# Allegro board Led_touch_3dprinter_24V.brd
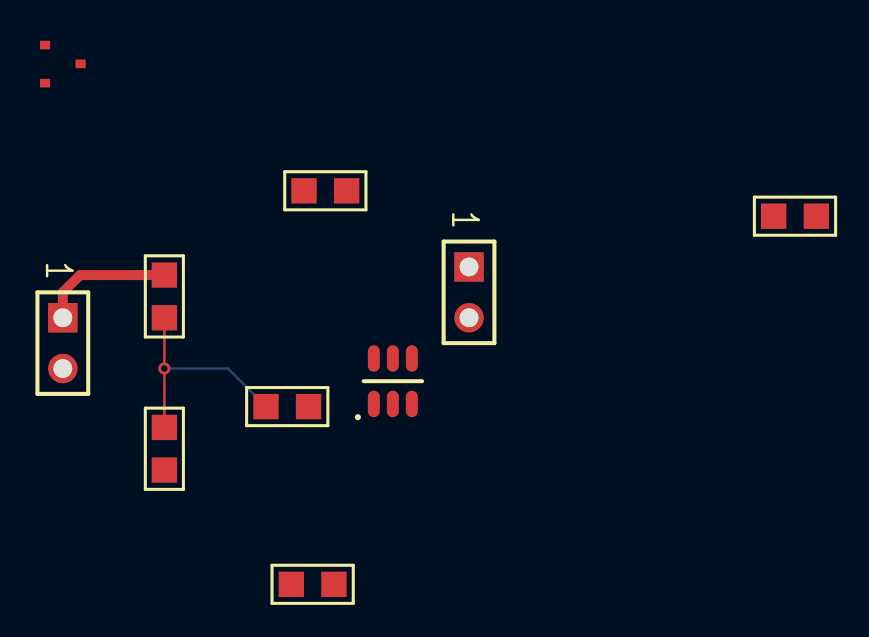
[diagram p0: board, top side]
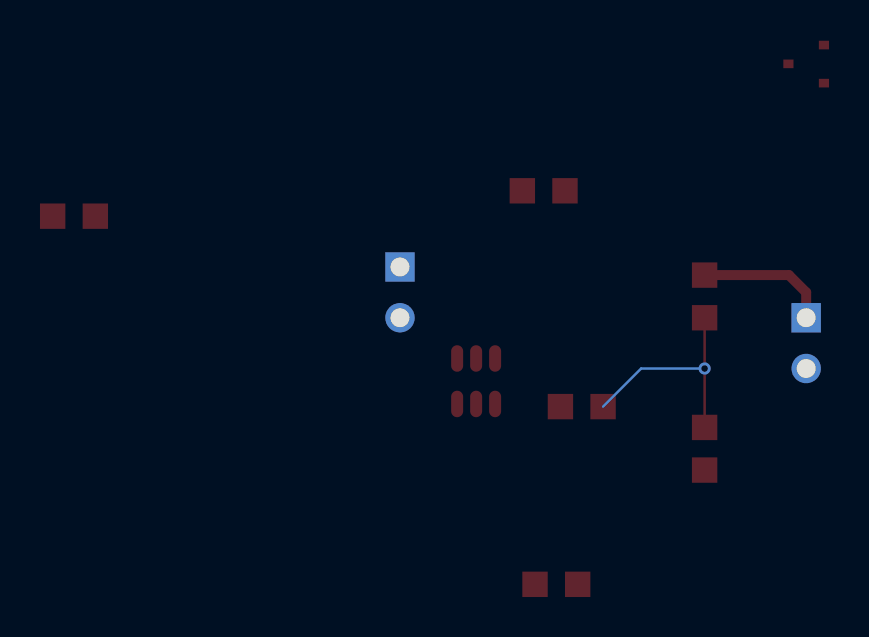
[diagram p1: board, bottom side, seen from below]

No outline. copper layers: TOP, BOTTOM. Coordinates in mm from the lowest, leftmost part position.

## Design rules (mm)
constraint set DEFAULT: min track width 0.127

## Placement (name value [footprint] x y rotation side)
C1  10pf  [SMC0805]  12.06 19.69 0 top
C2  100nf  [SMC0805]  10.16 8.89 0 top
C3  1uf  [SMC0805]  35.56 18.42 0 top
J1  HEADER 2  [BLKCON100VHTM1SQW1002]  20.32 15.88 270 top
J2  HEADER 2  [BLKCON100VHTM1SQW1002]  0 13.34 270 top
M1  AO3402  [SOT23]  0 26.04 0 top
R1  100k  [SMC0805]  5.08 13.34 90 top
R2  24k  [SMC0805]  5.08 5.72 90 top
R3  10  [SMC0805]  11.43 0 0 top
U1  ttp223  [SOT23_6]  16.51 10.16 90 top

## Library data of the parts
C1-C3 = C
J1 J2 = HEADER 2
M1 = IRFZ34_1
R1-R3 = R
U1 = ttp223

## Footprints (pads in the part's own frame, mm; a bottom-side part is the same pattern mirrored in y, then rotated)
BLKCON100VHTM1SQW1002
  rect 1.473x1.473 hole 0.94: 1(0,0)
  round 1.473 hole 0.94: 2(2.54,0)
SMC0805
  rect 1.27x1.27 smd: 1(0,0) 2(2.134,0)
SOT23
  rect 0.508x0.432 smd: 1(-0.889,0.94) 2(-0.889,-0.965) 3(0.889,0)
SOT23_6
  oval 1.325x0.6 smd: 1(-1.137,0.95) 2(-1.137,0) 3(-1.137,-0.95) 4(1.137,-0.95) 5(1.137,0) 6(1.137,0.95)

## Nets
0: C1.2 C2.2 C3.2 J2.2 M1.3(S) R2.1 U1.2 U1.4
LED_24V_NEGATIVE: J1.1 M1.2
LED_24V_POSITIVE: J1.2 J2.1 R1.2
OUTPUT: R3.1 U1.1
TOUCH_PAD: C1.1 U1.3
N15646: C2.1 C3.1 R1.1 R2.2 U1.5(VDD) U1.6
N16602: M1.1 R3.2

## Via types
v1: diameter 0.61, hole 0.33, TOP to BOTTOM, 1 via

## Routing (per net, layer and track width the routed paths; a pad name or vN(x,y) marks a point on that pad's centre or on a via; arc(x,y) is an arc through that point)
LED_24V_POSITIVE: length 6.7
  TOP w0.5: J2.1 0,14.61 0.86,15.47 R1.2
N15646: length 11.4
  TOP w0.127: R2.2 v1(5.08,10.8) R1.1
  BOTTOM w0.127: C2.1 8.25,10.8 v1(5.08,10.8)
